# EAGLE board mippe_mobo (EAGLE 9.5.2)
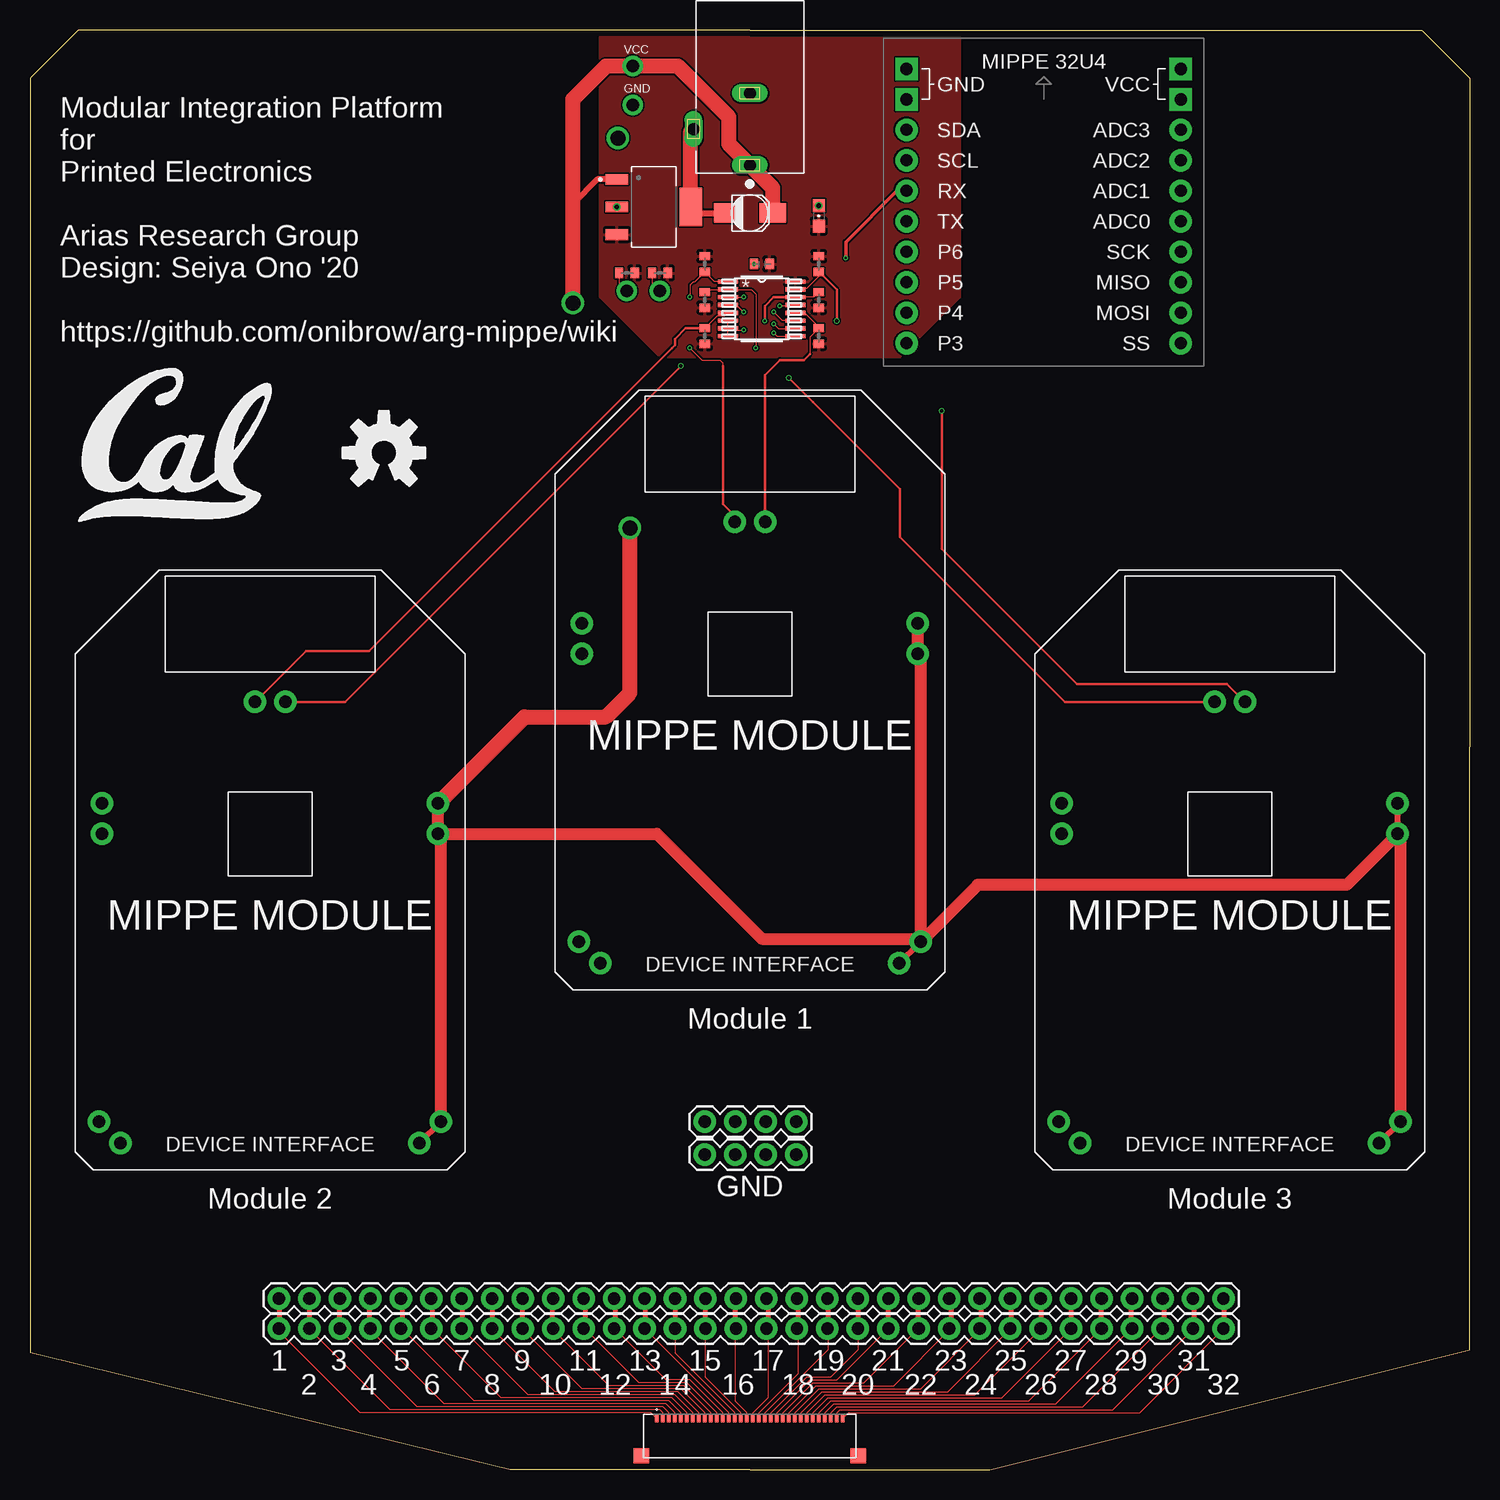
[diagram p0: board, top side]
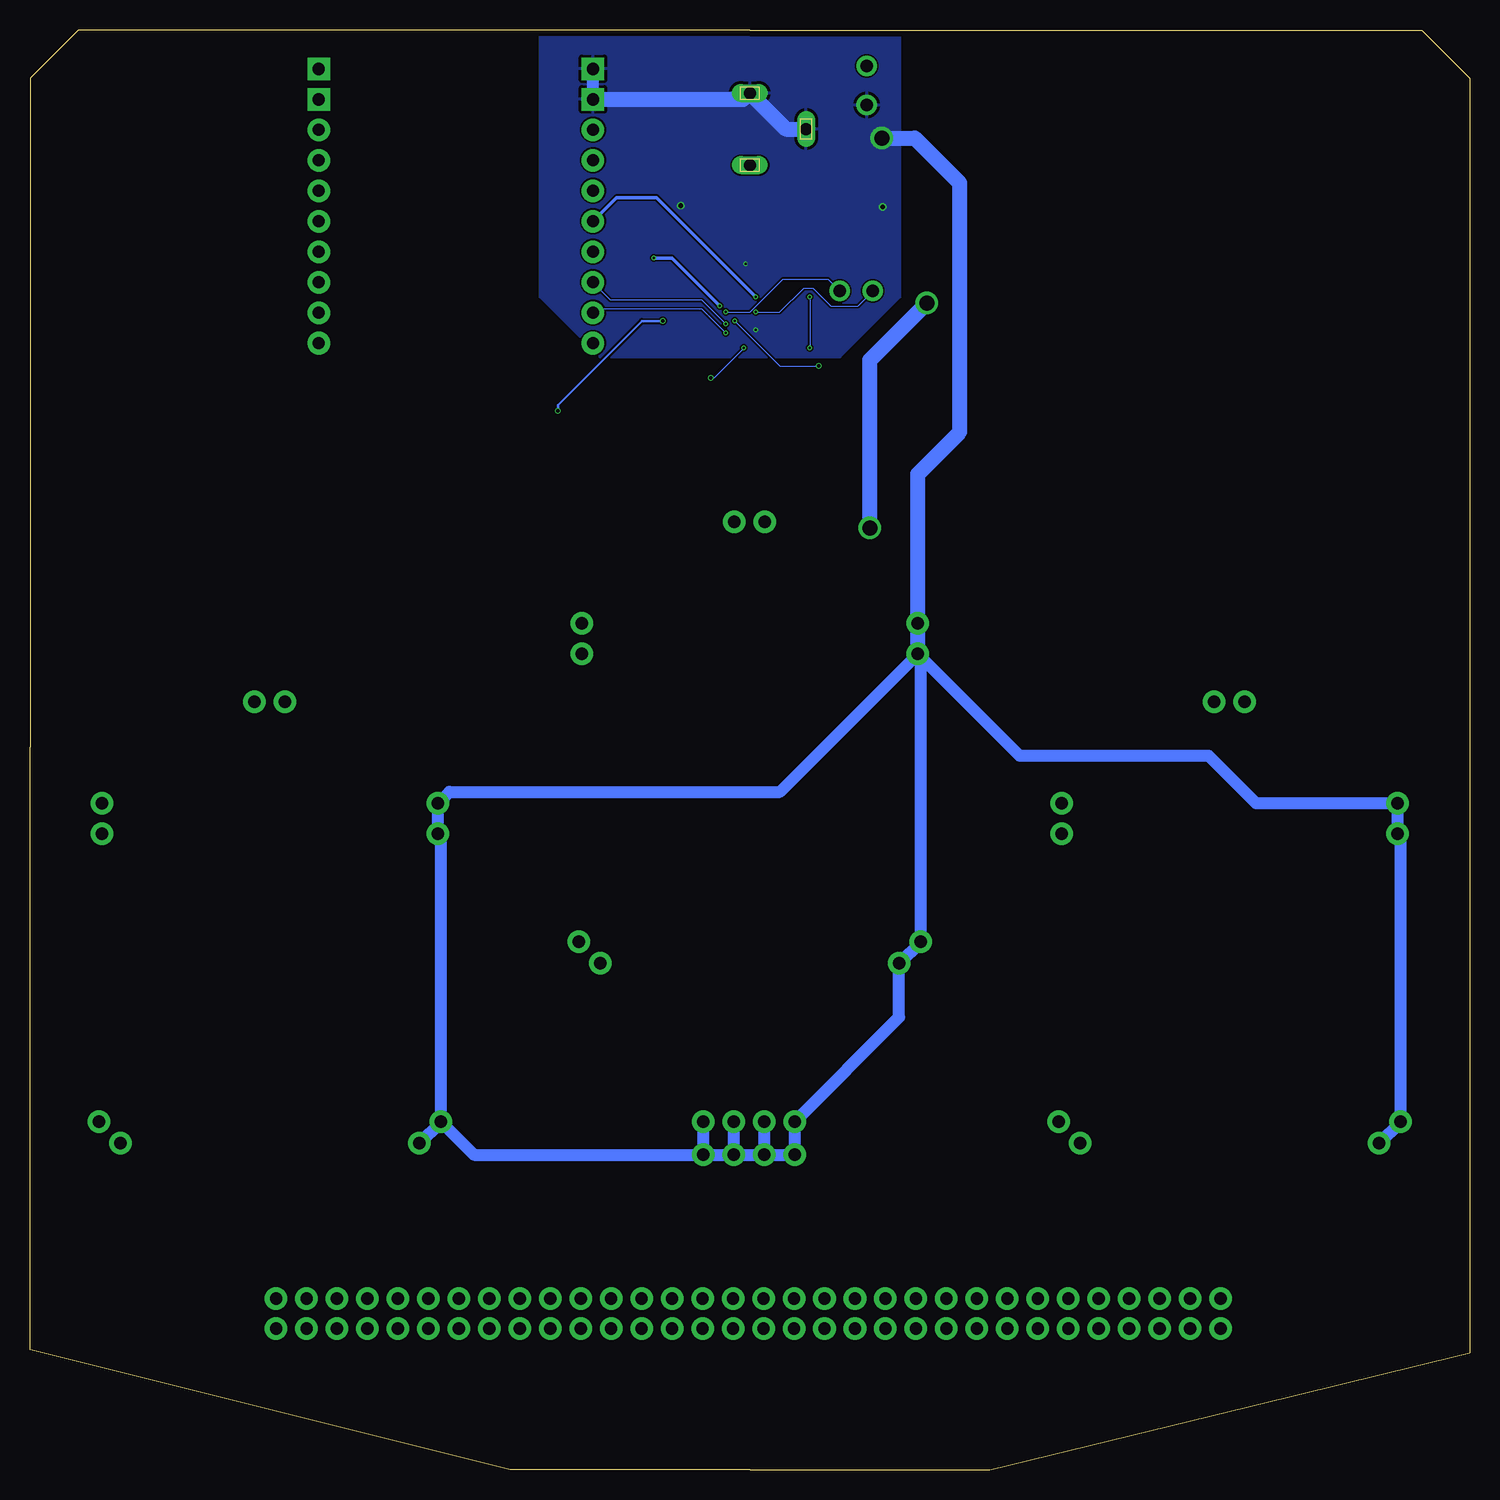
[diagram p1: board, bottom side, seen from below]

Size 120 x 120 mm. Coordinates in mm from the lower left corner, seen from the top.
Outline: 60,0 80,0 120,10 120,60.25 120,116 116,120 60,120 4,120 0,116 0,60 0,9.75 40,0 60,0
Copper layers (1*16): Top 2mil / dielectric 9mil / Bottom 2mil
Design rules "scono": minimum track width 3.5mil, minimum drill 0.2mm, track to track 5.5mil, track to pad 5.5mil, pad to pad 5.5mil, via to via 5.5mil, smd to smd 0mil, copper to edge 0.5mm, drill to drill 0.5mm, minimum pad ring 3mil, minimum via ring 3mil, stop-mask expansion 3mil, vias tented up to drill 0mil, thermal gap 10mil
Net classes: 1 supply: width 0.152 mm, drill 0.152 mm, clearance 0.152 mm

## Footprints (pad centres in the part's own frame; a part is rotated, then mirrored left to right if it is on the bottom)
MIPPE_MOD = drill 1.016 pad 1.88: GND@0 -12.454,2.204; GND@1 -14.25,4; GND@2 -14,28; GND@3 -14,30.54; RX -1.25,39; TX 1.29,39; VCC@0 12.454,2.204; VCC@1 14.25,4; VCC@2 14,28; VCC@3 14,30.54
0402-CAP = smd 0.7 x 0.9: 1 -0.65,0; 2 0.65,0
0603-CAP = smd 1.1 x 1: 1 -0.85,0; 2 0.85,0
CAP_3MM = smd 1.6 x 2.2: NEG 0,-1.9; POS 0,1.9
1X32 = drill 1.016 pad 1.88: 1 0,0; 2 2.54,0; 3 5.08,0; 4 7.62,0; 5 10.16,0; 6 12.7,0; 7 15.24,0; 8 17.78,0; 9 20.32,0; 10 22.86,0; 11 25.4,0; 12 27.94,0; 13 30.48,0; 14 33.02,0; 15 35.56,0; 16 38.1,0; 17 40.64,0; 18 43.18,0; 19 45.72,0; 20 48.26,0; 21 50.8,0; 22 53.34,0; 23 55.88,0; 24 58.42,0; 25 60.96,0; 26 63.5,0; 27 66.04,0; 28 68.58,0; 29 71.12,0; 30 73.66,0; 31 76.2,0; 32 78.74,0
MOLEX_503480-3200 = smd 0.3 x 0.7: 1 -7.75,1.8; 2 -7.25,1.8; 3 -6.75,1.8; 4 -6.25,1.8; 5 -5.75,1.8; 6 -5.25,1.8; 7 -4.75,1.8; 8 -4.25,1.8; 9 -3.75,1.8; 10 -3.25,1.8; 11 -2.75,1.8; 12 -2.25,1.8; 13 -1.75,1.8; 14 -1.25,1.8; 15 -0.75,1.8; 16 -0.25,1.8; 17 0.25,1.8; 18 0.75,1.8; 19 1.25,1.8; 20 1.75,1.8; 21 2.25,1.8; 22 2.75,1.8; 23 3.25,1.8; 24 3.75,1.8; 25 4.25,1.8; 26 4.75,1.8; 27 5.25,1.8; 28 5.75,1.8; 29 6.25,1.8; 30 6.75,1.8; 31 7.25,1.8; 32 7.75,1.8 | smd 1.27 x 1.27: SH1 -9.04,-1.35; SH2 9.04,-1.35
CUI_PJ-102AH = drill 1 long: 1 -6.5,0; 2 -0.5,0; 3 -3.5,4.7
1X04 = drill 1.016 pad 1.88: 1 0,0; 2 2.54,0; 3 5.08,0; 4 7.62,0
R0402 = smd 0.7 x 0.9: 1 -0.65,0; 2 0.65,0
TEST_POINT = drill 1.016 pad 1.676: 1 0,0
PW16 = smd 1.676 x 0.356: 1 -2.819,2.275; 2 -2.819,1.625; 3 -2.819,0.975; 4 -2.819,0.325; 5 -2.819,-0.325; 6 -2.819,-0.975; 7 -2.819,-1.625; 8 -2.819,-2.275; 9 2.819,-2.275; 10 2.819,-1.625; 11 2.819,-0.975; 12 2.819,-0.325; 13 2.819,0.325; 14 2.819,0.975; 15 2.819,1.625; 16 2.819,2.275
MIPPE = drill 1.016 pad 1.88: ADC0 11.43,-4.445; ADC1 11.43,-1.905; ADC2 11.43,0.635; ADC3 11.43,3.175; GPIO3 -11.43,-14.605; GPIO4 -11.43,-12.065; GPIO5 -11.43,-9.525; GPIO6 -11.43,-6.985; MISO 11.43,-9.525; MOSI 11.43,-12.065; RX -11.43,-1.905; SCK 11.43,-6.985; SCL -11.43,0.635; SDA -11.43,3.175; SS 11.43,-14.605; TX -11.43,-4.445 | drill 1.016 pad 1.88 square: GND@0 -11.43,5.715; GND@1 -11.43,8.255; VCC 11.43,8.255; VCC@1 11.43,5.715
SOT230P700X180-4N = smd 1.86 x 0.9: 1 -3.075,2.3; 2 -3.075,0; 3 -3.075,-2.3 | smd 1.86 x 3.19: 4 3.075,0

## Placement (x,y rotation side)
B1  [MIPPE_MOD]  60,40 0 top
B2  [MIPPE_MOD]  20,25 0 top
B3  [MIPPE_MOD]  100,25 0 top
C1  0.1uF  [0402-CAP]  61,100.5 0 top
C2  0.1uF  [0603-CAP]  65.75,104.5 270 top
C8  [CAP_3MM]  60,104.75 270 top
J1  [1X32]  20.75,14.25 0 top
J2  [1X32]  20.75,11.75 0 top
J3  FFC-32  [MOLEX_503480-3200]  60,2.5 0 top
J4  PJ-102AH  [CUI_PJ-102AH]  60,115.25 90 top
J6  [1X04]  56.25,26.25 0 top
J7  [1X04]  56.25,29 0 top
L1  UCB_CAL500MIL  [UCB_CAL_500MIL]  4,79 0 top
R1  10k  [R0402]  56.25,100.5 270 top
R2  10k  [R0402]  65.75,94.5 90 top
R3  10k  [R0402]  56.25,94.5 90 top
R4  10k  [R0402]  65.75,97.5 90 top
R5  10k  [R0402]  56.25,97.5 90 top
R6  10k  [R0402]  65.75,100.5 270 top
R13  10k  [R0402]  52.5,99.75 0 top
R14  10k  [R0402]  49.75,99.75 0 top
TP1  TEST_POINTTHRU  [TEST_POINT]  49.75,98.25 0 top
TP2  TEST_POINTTHRU  [TEST_POINT]  52.5,98.25 0 top
TP3  TEST_POINTTHRU  [TEST_POINT]  50.25,113.75 0 top
TP4  TEST_POINTTHRU  [TEST_POINT]  50.25,117 0 top
U1  CD4052BPWR  [PW16]  61,96.75 0 top
U2  MIPPE  [MIPPE]  84.5,108.5 0 top
U3  LM340MPX-5.0230  [SOT230P700X180-4N]  52,105.25 0 top
U$17  [OSHW-LOGO-L]  29.5,84.75 0 top

## Library data of the parts
B1-B3 C8 J1 J2 L1 R1-R6 R13 R14 TP1-TP4 U2 U3 = scono
C1 C2 = scono; PIE-INT-REF-NUM: CAPACITOR-GENERIC
J3 = scono; DESCRIPTION: 0.50mm Pitch Easy-On™ BackFlip™ Type FPC Connector, 1.00mm Height, Right Angle, Surface Mount, Dual Contact Style, 32...; DIGI-KEY_PART_NUMBER: WM11115CT-ND; DIGI-KEY_PURCHASE_URL: https://www.digikey.com/product-detail/en/molex/5034803200/WM11115CT-ND/5171273?utm_source=snapeda&utm_medium=aggregator&utm_campaign=symbol; MF: Molex; MP: 5034803200; PACKAGE: None
J4 = scono; AVAILABILITY: Unavailable; CUI_PURCHASE_URL: https://www.cuidevices.com/product/interconnect/connectors/dc-power-connectors/jacks/pj-102ah?utm_source=snapeda.com&utm_medium=referral&utm_campaign=snapedaBOM; DESCRIPTION: 2.0 x 6.5 mm, 5.0 A, Horizontal, Through Hole, Tapered Pins, Dc Power Jack Connector; MF: CUI Devices; MP: PJ-102AH; PACKAGE: None; PRICE: None
J6 J7 = scono; PROD_ID: CONN-09696
U1 = scono; BUILT_BY: EMA_UL_Team; MANUFACTURER: Texas Instruments; MANUFACTURER_PART_NUMBER: CD4052BPWR; VENDOR: Vendor
U$17 = pie

## Nets
5V: C1.2 C2.2 R1.1 R2.1 R3.1 R4.1 R5.1 R6.1 R13.2 R14.2 U1.16 U3.3
A: U1.10 U2.GPIO5
B: U1.9 U2.GPIO4
GND: B1.GND@0 B1.GND@1 B1.GND@2 B1.GND@3 B2.GND@0 B2.GND@1 B2.GND@2 B2.GND@3 B3.GND@0 B3.GND@1 B3.GND@2 B3.GND@3 C1.1 C2.1 C8.NEG J4.2 J4.3 J6.1 J6.2 J6.3 J6.4 J7.1 J7.2 J7.3 J7.4 TP3.1 U1.6 U1.7 U1.8 U2.GND@0 U2.GND@1 U3.2 U3.4
N$1: J1.1 J2.1 J3.1
N$2: J1.2 J2.2 J3.2
N$3: J1.3 J2.3 J3.3
N$4: J1.4 J2.4 J3.4
N$5: J1.5 J2.5 J3.5
N$6: J1.6 J2.6 J3.6
N$7: J1.7 J2.7 J3.7
N$8: J1.8 J2.8 J3.8
N$9: J1.9 J2.9 J3.9
N$10: J1.10 J2.10 J3.10
N$11: J1.11 J2.11 J3.11
N$12: J1.12 J2.12 J3.12
N$13: J1.13 J2.13 J3.13
N$14: J1.14 J2.14 J3.14
N$15: J1.15 J2.15 J3.15
N$16: J1.16 J2.16 J3.16
N$17: J1.17 J2.17 J3.17
N$18: J1.18 J2.18 J3.18
N$19: J1.19 J2.19 J3.19
N$20: J1.20 J2.20 J3.20
N$21: J1.21 J2.21 J3.21
N$22: J1.22 J2.22 J3.22
N$23: J1.23 J2.23 J3.23
N$24: J1.24 J2.24 J3.24
N$25: J1.25 J2.25 J3.25
N$26: J1.26 J2.26 J3.26
N$27: J1.27 J2.27 J3.27
N$28: J1.28 J2.28 J3.28
N$29: J1.29 J2.29 J3.29
N$30: J1.30 J2.30 J3.30
N$31: J1.31 J2.31 J3.31
N$32: J1.32 J2.32 J3.32
RX: U1.13 U2.RX
RX1: B1.RX R1.2 U1.1
RX2: B2.RX R3.2 U1.5
RX3: B3.RX R5.2 U1.2
RX4: R14.1 TP1.1 U1.4
TX: U1.3 U2.TX
TX1: B1.TX R2.2 U1.12
TX2: B2.TX R4.2 U1.14
TX3: B3.TX R6.2 U1.15
TX4: R13.1 TP2.1 U1.11
VCC: B1.VCC@0 B1.VCC@1 B1.VCC@2 B1.VCC@3 B2.VCC@0 B2.VCC@1 B2.VCC@2 B2.VCC@3 B3.VCC@0 B3.VCC@1 B3.VCC@2 B3.VCC@3 C8.POS J4.1 TP4.1 U3.1

## Tracks (layer width: path | path; a pad name or v marks a point on that pad's centre or on a via)
5V
  pour Top: 47.5,119.75 47.5,97.75 52.5,92.75 72.5,92.75 77.5,97.75 77.5,119.75
A  (via drill 0.2)
  Top 0.1: v62,95.5 62.38,95.12 U1.10
  Bottom 0.1: v62,95.5 64,97.5 71.59,97.5 U2.GPIO5
B  (via drill 0.2)
  Top 0.1: v62,94.75 62.27,94.47 U1.9
  Bottom 0.1: v62,94.75 63.5,96.25 64,96.75 72.75,96.75 U2.GPIO4
GND  (via drill 0.2, 0.4, 1.25)
  Top 0.1: U1.8 U1.7 | U1.7 U1.6 | U1.7 58.31,95 v59.5,95
  Top 0.5: U3.4 55.58,104.75 C8.NEG
  Top 1.25: U3.4 55.08,111.53 J4.3
  Bottom 0.5: 45.75,67.75 45.88,67.88 B1.GND@2 | 5.75,52.75 B2.GND@2
  Bottom 1: B3.GND@0 B3.GND@1 | B3.GND@1 85.75,52.75 B3.GND@2 B3.GND@3 85.04,56.5 57.5,56.5 B1.GND@2 | 45.75,67.75 B1.GND@1 B1.GND@0 47.55,37.7 J7.1 J6.1 J6.2 | B2.GND@0 B2.GND@1 5.75,52.75 | B2.GND@2 B2.GND@3 17.79,55.54 21.75,59.5 37.5,59.5 45.88,67.88 | B3.GND@1 83,26.25 J6.4 | J6.4 J6.3 | J6.3 J6.2 | J6.2 J7.2 | J6.3 J7.3 | J6.4 J7.4 | U2.GND@0 U2.GND@1
  Bottom 1.25: B1.GND@2 B1.GND@3 46,83 42.5,86.5 42.5,107.25 46.25,111 48.5,111 v49,111 | U2.GND@0 60.53,114.22 J4.2 57,111.75 J4.3
  other vias: 60.35,100.5 48.92,105.25 65.75,105.35
  pour Bottom: 47.5,119.75 47.5,97.75 52.5,92.75 72.5,92.75 77.5,97.75 77.5,119.75
N$1
  Top 0.1: J3.1 52.2,4.3 51.75,4.75 27.5,4.75 20.75,11.5 J2.1
  Top 0.4: J1.1 J2.1
N$2
  Top 0.1: J3.2 52.75,4.75 52.5,5 30,5 23.25,11.75
  Top 0.4: J1.2 23.25,14.21 23.25,11.75 J2.2
N$3
  Top 0.1: J3.3 53.25,4.75 52.75,5.25 52.5,5.25 32.25,5.25 25.83,11.67 J2.3
  Top 0.4: J1.3 25.75,14.17 25.75,11.83 J2.3
N$4
  Top 0.1: J3.4 53.75,4.75 53,5.5 34.5,5.5 28.37,11.63 J2.4
  Top 0.4: J1.4 28.25,14.13 28.25,11.87 J2.4
N$5
  Top 0.1: J3.5 54.25,4.75 53.25,5.75 37,5.75 31,11.75 J2.5
  Top 0.4: J1.5 31,14.16 31,11.84 J2.5
N$6
  Top 0.1: J3.6 54.75,4.75 53.5,6 39.25,6 33.5,11.75 J2.6
  Top 0.4: J1.6 33.5,14.2 33.5,11.8 J2.6
N$7
  Top 0.1: J3.7 55.25,4.75 53.75,6.25 41.5,6.25 J2.7
  Top 0.4: J1.7 J2.7
N$8
  Top 0.1: J3.8 55.75,4.75 54,6.5 45.5,6.5 43.75,6.5 38.53,11.72 J2.8
  Top 0.4: J1.8 38.5,14.22 38.5,11.78 J2.8
N$9
  Top 0.1: J3.9 56.25,4.75 54.25,6.75 46,6.75 41.07,11.68 J2.9
  Top 0.4: J1.9 41,14.18 41,11.82 J2.9
N$10
  Top 0.1: J3.10 56.75,4.75 54.5,7 48.25,7 43.61,11.64 J2.10
  Top 0.4: J1.10 43.5,14.14 43.5,11.86 J2.10
N$11
  Top 0.1: J3.11 57.25,4.75 54.75,7.25 50.75,7.25 46.25,11.75 J2.11
  Top 0.4: J1.11 46.25,14.15 46.25,11.85 J2.11
N$12
  Top 0.1: J3.12 57.75,4.75 55,7.5 53,7.5 48.75,11.75 J2.12
  Top 0.4: J1.12 48.75,14.19 48.75,11.81 J2.12
N$13
  Top 0.1: J2.13 51.25,11.75 55.25,7.75 58.25,4.75 J3.13
  Top 0.4: J1.13 51.25,14.23 51.25,11.77 J2.13
N$14
  Top 0.1: J3.14 58.75,4.75 53.75,9.75 53.75,11.73 J2.14
  Top 0.4: J1.14 53.75,14.23 53.75,11.77 J2.14
N$15
  Top 0.1: J3.15 59.25,4.75 56.25,7.75 56.25,11.69 J2.15
  Top 0.4: J1.15 56.25,14.19 56.25,11.81 J2.15
N$16
  Top 0.1: J2.16 58.8,11.7 58.8,5.7 59.75,4.75 J3.16
  Top 0.4: J1.16 58.75,14.15 58.75,11.85 J2.16
N$17
  Top 0.1: J3.17 60.25,4.75 61.5,6 61.5,11.64 J2.17
  Top 0.4: J1.17 61.5,14.14 61.5,11.86 J2.17
N$18
  Top 0.1: J3.18 60.75,4.75 64,8 64,11.68 J2.18
  Top 0.4: J1.18 64,14.18 64,11.82 J2.18
N$19
  Top 0.1: J3.19 61.25,4.75 66.5,10 66.5,11.72 J2.19
  Top 0.4: J1.19 66.5,14.22 66.5,11.78 J2.19
N$20
  Top 0.1: J3.20 61.75,4.75 64.75,7.75 66.75,7.75 69,10 J2.20
  Top 0.4: J1.20 J2.20
N$21
  Top 0.1: J3.21 62.25,4.75 65,7.5 67.25,7.5 71.5,11.75 J2.21
  Top 0.4: J1.21 71.5,14.2 71.5,11.8 J2.21
N$22
  Top 0.1: J2.22 74,11.75 69.5,7.25 65.25,7.25 62.75,4.75 J3.22
  Top 0.4: J2.22 74,11.84 74,14.16 J1.22
N$23
  Top 0.1: J3.23 63.25,4.75 65.5,7 72,7 76.63,11.63 J2.23
  Top 0.4: J1.23 76.75,14.13 76.75,11.87 J2.23
N$24
  Top 0.1: J3.24 63.75,4.75 65.75,6.75 74.25,6.75 79.17,11.67 J2.24
  Top 0.4: J1.24 79.25,14.17 79.25,11.83 J2.24
N$25
  Top 0.1: J3.25 64.25,4.75 66,6.5 76.5,6.5 81.71,11.71 J2.25
  Top 0.4: J1.25 81.75,14.21 81.75,11.79 J2.25
N$26
  Top 0.1: J3.26 64.75,4.75 66.25,6.25 78.75,6.25 J2.26
  Top 0.4: J1.26 J2.26
N$27
  Top 0.1: J3.27 65.25,4.75 66.5,6 81,6 86.75,11.75 J2.27
  Top 0.4: J1.27 86.75,14.21 86.75,11.79 J2.27
N$28
  Top 0.1: J3.28 65.75,4.75 66.75,5.75 83.25,5.75 89.25,11.75 J2.28
  Top 0.4: J1.28 89.25,14.17 89.25,11.83 J2.28
N$29
  Top 0.1: J3.29 66.25,4.75 67,5.5 85.5,5.5 91.75,11.75 J2.29
  Top 0.4: J1.29 91.75,14.13 91.75,11.87 J2.29
N$30
  Top 0.1: J3.30 66.75,4.75 67.25,5.25 87.75,5.25 94.25,11.75 94.5,11.75
  Top 0.4: J1.30 94.5,14.16 94.5,11.75 J2.30
N$31
  Top 0.1: J3.31 67.25,4.75 67.5,5 90.25,5 96.95,11.7 J2.31
  Top 0.4: J1.31 97,14.2 97,11.8 J2.31
N$32
  Top 0.1: J3.32 67.8,4.3 68.25,4.75 92.5,4.75 J2.32
  Top 0.4: J1.32 J2.32
RX  (via drill 0.2)
  Top 0.1: U1.13 63.74,97 v62.5,97
  Top 0.3: v68,101 68,102.32 72.28,106.59 U2.RX
  Bottom 0.3: v62.5,97 66.5,101 v68,101
RX1  (via drill 0.2)
  Top 0.1: U1.1 57.08,99.03 R1.2 55.4,99 55.25,99 55,98.75 v55,97.75 | v55,93.5 56,92.5 57.5,92.5 57.75,92.25 57.75,92
  Top 0.2: B1.RX 58.75,79.5 57.75,80.5 57.75,92
  Bottom 0.1: v55,97.75 v55,93.5
RX2
  Top 0.1: U1.5 57.9,96.14 57.26,96.14 56.27,95.15 R3.2
  Top 0.2: R3.2 54.65,95.15 53.75,94.25 53.75,93.75 53.5,93.5 28.25,68.25 23,68.25 B2.RX
RX3  (via drill 0.2, 0.3)
  Top 0.1: R5.2 56.48,98.38 U1.2 60.12,98.38 60.5,98 v60.5,93.5
  Top 0.2: B3.RX 86.25,64 72.5,77.75 72.5,81.75 65.25,89 v63.25,91
  Bottom 0.1: v60.5,93.5 63,91 v63.25,91
RX4  (via drill 0.2)
  Top 0.1: U1.4 58.91,97.08 v59.49,96.49 | R14.1 49.1,98.9 TP1.1
  Bottom 0.1: v59.49,96.49 57.51,96.49 55.5,98.5 54.75,98.5 53.25,97 51,97 TP1.1
TX  (via drill 0.2)
  Top 0.1: U1.3 59.48,97.72 v59.5,97.75
  Bottom 0.3: v59.5,97.75 67.78,106.03 71.1,106.03 U2.TX
TX1
  Top 0.1: U1.12 64.58,96.42 65.75,95.25 R2.2 65,94.4 65,93
  Top 0.2: 65,93 64.5,92.5 62.5,92.5 61.25,91.25 61.25,79.54 61.29,79.5 B1.TX
TX2  (via drill 0.2, 0.3)
  Top 0.1: R4.2 65.33,97.72 U1.14
  Top 0.2: B2.TX 26.25,64 v54.25,92 | v61.25,95.75 61.25,97 61.98,97.72 U1.14
  Bottom 0.1: v61.25,95.75 57.5,92 v54.25,92
TX3  (via drill 0.3)
  Top 0.1: U1.15 63.94,98.5 64.75,98.5 65.75,99.5 R6.2
  Top 0.2: B3.TX 99.79,65.5 87.25,65.5 76,76.75 v76,88.25 | R6.2 67.25,98.35 v67.25,95.75
  Bottom 0.2: v67.25,95.75 69,95.75 76,88.75 v76,88.25
TX4  (via drill 0.2)
  Top 0.1: U1.11 62.73,95.78 v62,96.5 | R13.1 51.85,98.9 TP2.1
  Bottom 0.1: v62,96.5 60,96.5 57.25,99.25 53.5,99.25 TP2.1
VCC  (via drill 1.25, 1.25 pad 1)
  Top 0.5: B2.VCC@0 B2.VCC@1 | 34.25,52.75 B2.VCC@2 | B1.VCC@0 74.12,43.88 B1.VCC@1 74,44.25 | 74.25,67.75 B1.VCC@2 | B3.VCC@0 B3.VCC@1 | 114.25,52.75 B3.VCC@2 B3.VCC@3 | U3.1 47.3,107.55 45.25,105.5
  Top 1: B2.VCC@1 34.25,52.75 | B2.VCC@3 B2.VCC@2 52.25,53 61,44.25 74,44.25 | B1.VCC@1 74.25,67.75 | B1.VCC@2 B1.VCC@3 | B3.VCC@1 114.25,52.75 | B3.VCC@2 109.75,48.75 79,48.75 74.12,43.88
  Top 1.25: B2.VCC@3 41.21,62.75 48,62.75 50,64.75 v50,78.5 | v45.25,97.25 45.25,105.5 45.25,114.25 48,117 TP4.1 54,117 58.25,112.75 58.25,110.5 J4.1 61.9,106.85 C8.POS
  Bottom 1.25: v50,78.5 50,92.5 v45.25,97.25

## Text on the board
tPlace: VCC | GND | Modular Integration Platform / for / Printed Electronics / / Arias Research Group / Design: Seiya Ono '20 / / https://github.com/onibrow/arg-mippe/wiki | Module 1 | Module 2 | Module 3 | GND | 1 | 3 | 5 | 7 | 9 | 11 | 13 | 15 | 17 | 19 | 21 | 23 | 25 | 27 | 29 | 31 | 2 | 4 | 6 | 8 | 10 | 12 | 14 | 16 | 18 | 20 | 22 | 24 | 26 | 28 | 30 | 32
bCream: Design by Seiya Fa'19